# EAGLE board SHIELD_TEST_DISP (EAGLE 9.6.2)
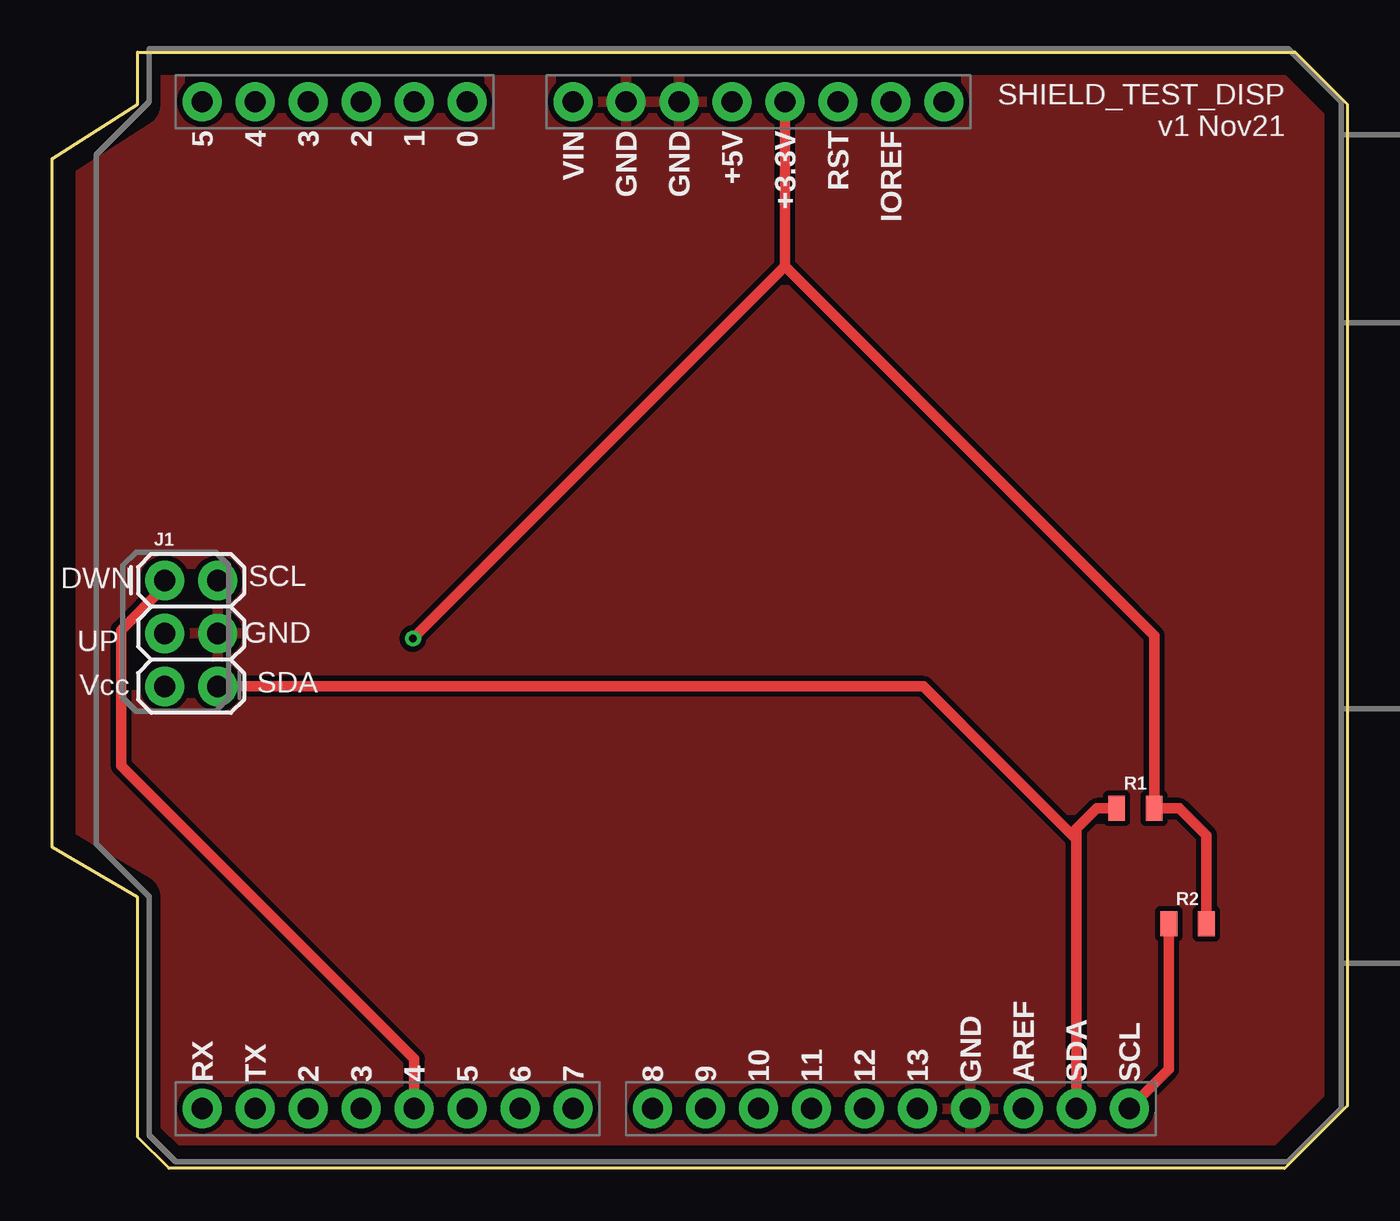
[diagram p0: board, top side]
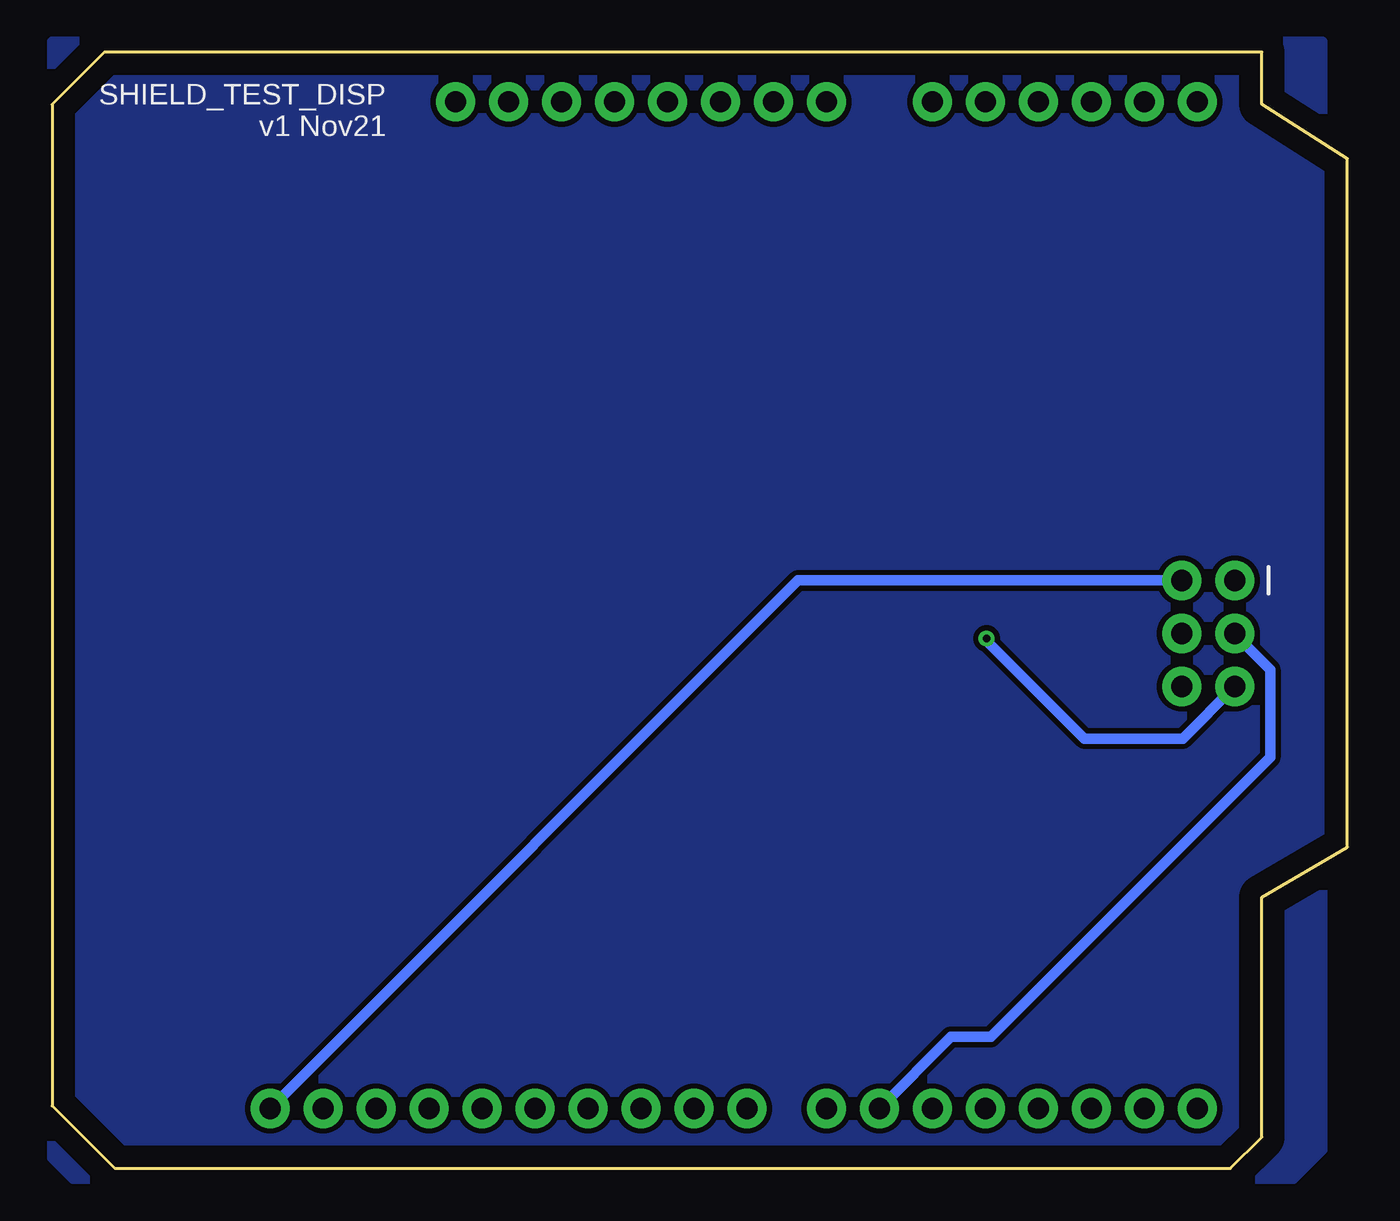
[diagram p1: board, bottom side, seen from below]

Size 62.1 x 53.5 mm. Coordinates in mm from the lower left corner, seen from the top.
Outline: 0,48.4 4.1,51 4.1,53.5 59.6,53.5 62.1,51 62.1,3 59.1,0 5.6,0 4.1,1.5 4.1,13 0,15.4 0,48.4
Copper layers (1*16): Top 0.035mm / dielectric 1.5mm / Bottom 0.035mm
Design rules "default *": minimum track width 6mil, minimum drill 0.35mm, track to track 10mil, track to pad 10mil, pad to pad 10mil, via to via 10mil, smd to smd 10mil, copper to edge 40mil, drill to drill 6mil, minimum pad ring 10mil, minimum via ring 8mil, stop-mask expansion 4mil, vias tented up to drill 0mil, thermal gap 10mil

## Footprints (pad centres in the part's own frame; a part is rotated, then mirrored left to right if it is on the bottom)
UNO_R3_SHIELD = drill 1.016 pad 1.88: 3.3V 24.13,-2.54; 5V 24.13,0; A0 24.13,12.7; A1 24.13,15.24; A2 24.13,17.78; A3 24.13,20.32; A4 24.13,22.86; A5 24.13,25.4; AREF -24.13,-13.97; D2 -24.13,20.32; D3 -24.13,17.78; D4 -24.13,15.24; D5 -24.13,12.7; D6 -24.13,10.16; D7 -24.13,7.62; D8 -24.13,3.81; D9 -24.13,1.27; D10 -24.13,-1.27; D11 -24.13,-3.81; D12 -24.13,-6.35; D13 -24.13,-8.89; GND@0 24.13,2.54; GND@1 24.13,5.08; GND@2 -24.13,-11.43; IOREF 24.13,-7.62; NC 24.13,-10.16; RES 24.13,-5.08; RX -24.13,25.4; SCL -24.13,-19.05; SDA -24.13,-16.51; TX -24.13,22.86; VIN 24.13,7.62
2X3 = drill 1.016 pad 1.88: 1 0,0; 2 0,2.54; 3 2.54,0; 4 2.54,2.54; 5 5.08,0; 6 5.08,2.54
0805 = smd 0.8 x 1.2: 1 -0.9,0; 2 0.9,0

## Placement (x,y rotation side)
B1  ARDUINO_UNO_R3_SHIELDBASIC  [UNO_R3_SHIELD]  32.6,27 90 top
J1  FEMALE 2x3  [2X3]  5.39,28.18 270 top
R1  [0805]  51.94,17.26 0 top
R2  [0805]  54.44,11.72 0 top

## Library data of the parts
B1 = SparkFun-Boards
J1 = SparkFun-Connectors; PROD_ID: CONN-11566
R1 R2 = SparkFun-Resistors

## Nets
DOWN: B1.D4 J1.1
GND: B1.GND@0 B1.GND@1 B1.GND@2 J1.4
SCL: B1.SCL J1.2 R2.1
SDA: B1.SDA J1.6 R1.1
UP: B1.D6 J1.3
VCC: B1.3.3V J1.5 R1.2 R2.2

## Tracks (layer width: path | path; a pad name or v marks a point on that pad's centre or on a via)
DOWN
  Top 0.508: B1.D4 17.36,5.25 17.35,5.25 3.3,19.3 3.3,25.8 5.39,27.89 J1.1
GND
  pour Top: 1.1,54 62.1,54 62.1,0.5 61.1,-0.5 2.6,-0.5 1.1,1
GND1
  pour Bottom: 1.2,54 62.1,54 62.1,0.5 61.1,-0.5 2.6,-0.5 1.2,0.9
SCL
  Top 0.508: B1.SCL 53.54,4.76 R2.1
  Bottom 0.508: B1.SCL 26.34,28.18 J1.2
SDA
  Top 0.508: R1.1 50.1,17.26 49.11,16.27 B1.SDA 49.11,15.77 41.78,23.1 J1.6
UP
  Bottom 0.508: J1.3 5.39,25.59 3.7,23.9 3.7,19.7 17.1,6.3 19.01,6.3 B1.D6
VCC  (via drill 0.35)
  Top 0.508: v17.3,25.4 35.14,43.24 | 35.14,43.24 B1.3.3V | 35.14,43.24 52.84,25.54 R1.2 54.04,17.26 55.34,15.96 R2.2
  Bottom 0.508: J1.5 7.89,20.6 12.6,20.6 17.3,25.3 v17.3,25.4

## Text on the board
tNames: SHIELD_TEST_DISP / v1 Nov21 | DWN | SCL | UP | GND | Vcc | SDA
bNames: SHIELD_TEST_DISP / v1 Nov21